# Altium PCB GSH_Bed v1.0.PcbDoc (part 2 of 6)
Units mil, origin at the board's own origin, x right, y up, seen from the top; angles counter-clockwise.
Board outline 4724.41 x 4921.3 mil, 2 copper layers (Top Layer, Bottom Layer); 2 components, 3 nets, 5 pads, 0 vias.
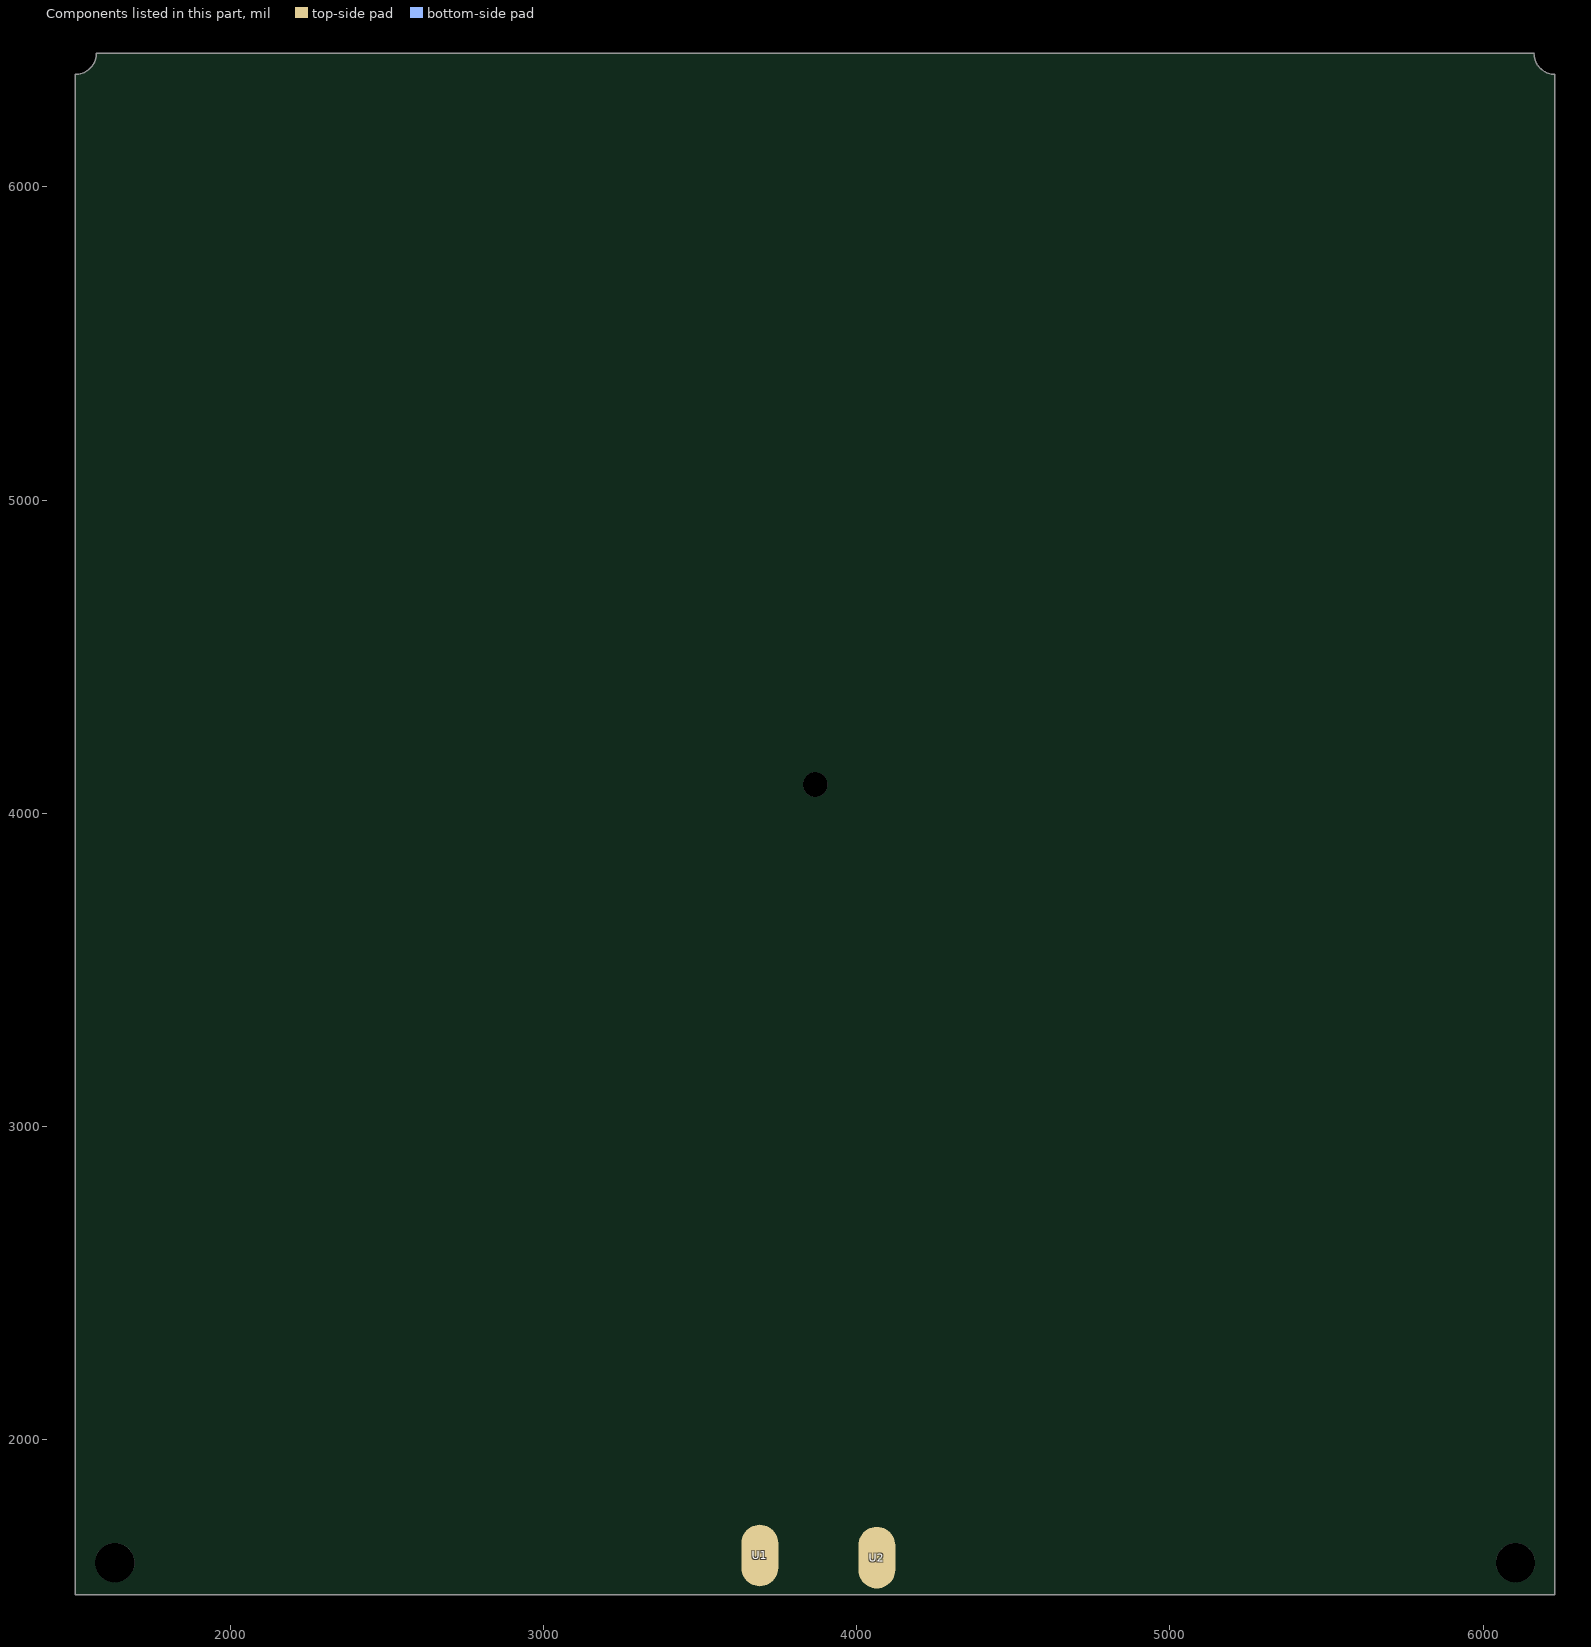
[diagram p2: the components of this part, seen from the top]

## Nets (pads, with @x,y where several pads share a name; then routed paths per layer and width w, separated by ;. In a path a pad name is that pad's centre, name@x,y a point inside that pad or via, vN(x,y) a via of type N, cw(c..) or ccw(c..) an arc to the next point about the centre after c; other vN are vias at no path point) (continued)
copper on no net: (continued)
  Top Layer w25.59: 1617.2,1760.9 1617.2,1792.5 1617.2,1831.8 ; 1617.2,1831.77 1652.64,1831.77 1652.64,1796.34 1723.5,1796.34 1723.5,1831.77 1688.07,1831.77 1688.07,1867.2 1723.5,1867.2 1723.5,1902.64 1652.64,1902.64 1652.64,1867.2 1617.2,1867.2 1617.2,1938.07 1652.64,1938.07 1652.64,1973.51 1617.2,1973.51 1617.2,2044.37 1652.64,2044.37 1652.64,2008.94 1688.07,2008.94 1688.07,2044.37 1723.5,2044.37 1723.5,1973.51 1688.07,1973.51 1688.07,1938.07 1758.94,1938.07 1794.37,1938.07 1794.37,1973.5 1758.93,1973.5 1758.93,2044.36 1794.37,2044.36 1794.37,2008.93 1829.8,2008.93 1829.8,2044.36 1865.23,2044.36 1865.23,1973.5 1829.8,1973.5 1829.8,1938.06 1865.23,1938.06 1865.23,1867.2 1829.8,1867.2 1829.8,1902.63 1758.93,1902.63 1758.93,1867.2 1794.36,1867.2 1794.36,1831.76 1758.93,1831.76 1758.93,1796.33 1829.8,1796.33 1829.8,1831.76 1865.23,1831.76 1865.23,1796.33 1936.09,1796.33 1936.09,1831.76 1900.66,1831.76 1900.66,1902.62 1936.09,1902.62 1936.09,1867.19 1971.53,1867.19 1971.53,1902.62 2006.96,1902.62 2006.96,1831.76 1971.53,1831.76 1971.53,1796.32 2042.39,1796.32 2042.39,1831.76 2077.83,1831.76 2077.83,1796.32 2148.69,1796.32 2148.69,1831.76 2113.26,1831.76 2113.26,1867.19 2148.69,1867.19 2148.69,1902.62 2077.83,1902.62 2077.83,1867.19 2042.4,1867.19 2042.4,1902.62 2042.4,1973.49 2077.84,1973.49 2077.84,1938.06 2148.7,1938.06 2148.7,1973.49 2113.27,1973.49 2113.27,2008.92 2148.7,2008.92 2148.7,2044.36 2077.84,2044.36 2077.84,2008.92 2042.4,2008.92 2042.4,2044.35 1971.54,2044.35 1971.54,2008.92 2006.97,2008.92 2006.97,1938.06 1971.54,1938.06 1971.54,1973.49 1936.1,1973.49 1936.1,1938.06 1900.67,1938.06 1900.67,2008.92 1936.1,2008.92 1936.1,2044.36 1900.67,2044.36 1900.67,2079.79 1936.1,2079.79 1936.1,2115.22 1900.67,2115.22 1900.67,2186.08 1936.1,2186.08 1936.1,2150.65 1971.53,2150.65 1971.53,2186.08 2006.97,2186.08 2006.97,2115.22 1971.53,2115.22 1971.53,2079.78 2042.4,2079.78 2042.4,2115.22 2077.84,2115.22 2077.84,2079.78 2148.7,2079.78 2148.7,2115.22 2113.27,2115.22 2113.27,2150.65 2148.7,2150.65 2148.7,2186.08 2077.84,2186.08 2077.84,2150.65 2042.4,2150.65 2042.4,2186.08 2042.4,2256.95 2077.84,2256.95 2077.84,2221.51 2148.71,2221.51 2148.71,2256.95 2113.28,2256.95 2113.28,2292.38 2148.71,2292.38 2148.71,2327.82 2077.84,2327.82 2077.84,2292.38 2042.41,2292.38 2042.41,2327.81 1971.54,2327.81 1971.54,2292.38 2006.98,2292.38 2006.98,2221.51 1971.54,2221.51 1971.54,2256.95 1936.11,2256.95 1936.11,2221.51 1900.68,2221.51 1900.68,2292.38 1936.11,2292.38 1936.11,2327.82 1900.68,2327.82 1865.24,2327.82 1865.24,2292.38 1829.8,2292.38 1829.8,2327.82 1758.94,2327.82 1758.94,2292.38 1794.37,2292.38 1794.37,2256.95 1758.94,2256.95 1758.94,2221.52 1829.8,2221.52 1829.8,2256.95 1865.24,2256.95 1865.24,2186.08 1829.81,2186.08 1829.81,2150.65 1865.24,2150.65 1865.24,2079.78 1829.81,2079.78 1829.81,2115.22 1794.37,2115.22 1794.37,2079.78 1758.94,2079.78 1758.94,2150.65 1794.37,2150.65 1794.37,2186.09 1723.51,2186.09 1688.08,2186.09 1688.08,2150.65 1723.51,2150.65 1723.51,2079.79 1688.08,2079.79 1688.08,2115.22 1652.64,2115.22 1652.64,2079.79 1617.21,2079.79 1617.21,2150.65 1652.64,2150.65 1652.64,2186.09 1617.21,2186.09 1617.21,2256.96 1652.65,2256.96 1652.65,2221.53 1723.51,2221.53 1723.51,2256.96 1688.08,2256.96 1688.08,2292.39 1723.51,2292.39 1723.51,2327.83 1652.65,2327.83 1652.65,2292.39 1617.21,2292.39 1617.22,2363.26 1652.65,2363.26 1652.65,2398.69 1617.21,2398.69 1617.21,2469.55 1652.65,2469.55 1652.65,2434.12 1688.08,2434.12 1688.08,2469.55 1723.52,2469.55 1723.52,2398.69 1688.08,2398.69 1688.08,2363.25 1758.95,2363.25 1758.95,2398.69 1794.39,2398.69 1794.39,2363.25 1865.25,2363.25 1865.25,2398.69 1829.82,2398.69 1829.82,2434.12 1865.25,2434.12 1865.25,2469.55 1794.39,2469.55 1794.39,2434.12 1758.95,2434.12 1758.95,2469.55 1758.95,2540.42 1794.39,2540.42 1794.39,2504.98 1865.26,2504.98 1865.26,2540.42 1829.83,2540.42 1829.83,2575.85 1865.26,2575.85 1865.26,2611.28 1794.39,2611.28 1794.39,2575.85 1758.96,2575.85 1758.96,2611.28 1688.09,2611.28 1688.09,2575.85 1723.53,2575.85 1723.53,2504.98 1688.09,2504.98 1688.09,2540.41 1652.66,2540.41 1652.66,2504.98 1617.22,2504.98 1617.22,2575.85 1652.66,2575.85 1652.66,2611.29 1617.22,2611.29 1617.22,2646.72 1617.22,2682.15 1652.66,2682.15 1652.66,2646.72 1723.53,2646.72 1723.53,2682.15 1688.1,2682.15 1688.1,2717.59 1723.53,2717.59 1723.53,2753.02 1652.66,2753.02 1652.66,2717.59 1617.23,2717.59 1617.23,2788.45 1652.66,2788.45 1652.66,2823.89 1617.23,2823.89 1617.23,2894.75 1652.66,2894.75 1652.66,2859.32 1688.09,2859.32 1688.09,2894.75 1723.53,2894.75 1723.53,2823.89 1688.09,2823.89 1688.09,2788.45 1758.96,2788.45 1794.39,2788.45 1794.39,2823.88 1758.96,2823.88 1758.96,2894.74 1794.39,2894.74 1794.39,2859.31 1829.83,2859.31 1829.83,2894.74 1865.26,2894.74 1865.26,2823.88 1829.83,2823.88 1829.83,2788.44 1865.26,2788.44 1865.26,2717.57 1829.82,2717.57 1829.82,2753.01 1758.96,2753.01 1758.96,2717.57 1794.39,2717.57 1794.39,2682.14 1758.96,2682.14 1758.96,2646.71 1829.82,2646.71 1829.82,2682.14 1865.25,2682.14 1865.25,2646.71 1900.68,2646.71 1900.68,2682.15 1936.12,2682.15 1936.12,2646.71 2006.99,2646.71 2006.99,2682.15 1971.56,2682.15 1971.56,2717.58 2006.99,2717.58 2006.99,2753.01 1936.12,2753.01 1936.12,2717.58 1900.69,2717.58 1900.69,2788.44 1936.12,2788.44 1936.12,2823.88 1900.69,2823.88 1900.69,2894.74 1936.12,2894.74 1936.12,2859.31 1971.55,2859.31 1971.55,2894.74 2006.99,2894.74 2006.99,2823.88 1971.55,2823.88 1971.55,2788.44 2042.42,2788.44 2077.85,2788.44 2077.85,2823.87 2042.42,2823.87 2042.42,2894.74 2077.85,2894.74 2077.85,2859.31 2113.28,2859.31 2113.28,2894.74 2148.72,2894.74 2148.72,2823.87 2113.28,2823.87 2113.28,2788.43 2148.72,2788.43 2148.72,2717.57 2113.28,2717.57 2113.28,2753 2042.42,2753 2042.42,2717.57 2077.85,2717.57 2077.85,2682.14 2042.42,2682.14 2042.42,2646.7 2113.28,2646.7 2113.28,2682.14 2148.71,2682.14 2148.71,2611.27 2113.28,2611.27 2113.28,2575.84 2148.71,2575.84 2148.71,2504.97 2113.28,2504.97 2113.28,2540.41 2077.85,2540.41 2077.85,2504.97 2042.41,2504.97 2042.41,2575.84 2077.85,2575.84 2077.85,2611.28 2006.98,2611.28 2006.98,2575.84 1971.54,2575.84 1971.54,2611.28 1900.68,2611.28 1900.68,2575.84 1936.11,2575.84 1936.11,2540.41 1900.68,2540.41 1900.68,2504.97 1971.54,2504.97 1971.54,2540.41 2006.98,2540.41 2006.98,2504.98 2006.98,2434.11 1971.54,2434.11 1971.54,2469.55 1900.67,2469.55 1900.67,2434.11 1936.1,2434.11 1936.1,2398.68 1900.67,2398.68 1900.67,2363.24 1971.54,2363.24 1971.54,2398.68 2006.97,2398.68 2006.97,2363.25 2077.84,2363.25 2077.84,2398.68 2042.4,2398.68 2042.4,2469.55 2077.84,2469.55 2077.84,2434.11 2113.27,2434.11 2113.27,2469.55 2148.7,2469.55 2148.7,2398.68 2113.27,2398.68 2113.27,2363.24 2148.7,2363.24 2219.57,2363.24 2219.57,2398.67 2184.13,2398.67 2184.13,2469.53 2219.57,2469.53 2219.57,2434.1 2255,2434.1 2255,2469.53 2290.44,2469.53 2290.44,2398.67 2255,2398.67 2255,2363.23 2325.87,2363.23 2325.87,2398.66 2361.31,2398.66 2361.31,2363.23 2432.17,2363.23 2432.17,2398.66 2396.74,2398.66 2396.74,2434.1 2432.17,2434.1 2432.17,2469.53 2361.31,2469.53 2361.31,2434.1 2325.87,2434.1 2325.87,2469.53 2325.87,2540.4 2361.31,2540.4 2361.31,2504.96 2432.18,2504.96 2432.18,2540.4 2396.75,2540.4 2396.75,2575.83 2432.18,2575.83 2432.18,2611.26 2361.31,2611.26 2361.31,2575.83 2325.88,2575.83 2325.88,2611.26 2255.01,2611.26 2255.01,2575.83 2290.45,2575.83 2290.45,2504.96 2255.01,2504.96 2255.01,2540.4 2219.58,2540.4 2219.58,2504.96 2184.14,2504.96 2184.14,2575.83 2219.58,2575.83 2219.58,2611.26 2184.14,2611.26 2184.14,2646.7 2184.14,2682.13 2219.58,2682.13 2219.58,2646.7 2290.45,2646.7 2290.45,2682.13 2255.02,2682.13 2255.02,2717.56 2290.45,2717.56 2290.45,2753 2219.58,2753 2219.58,2717.56 2184.15,2717.56 2184.15,2788.43 2219.58,2788.43 2219.58,2823.86 2184.15,2823.86 2184.15,2894.73 2219.58,2894.73 2219.58,2859.3 2255.01,2859.3 2255.01,2894.73 2290.45,2894.73 2290.45,2823.86 2255.01,2823.86 2255.01,2788.43 2325.88,2788.43 2361.31,2788.43 2361.31,2823.86 2325.88,2823.86 2325.88,2894.72 2361.31,2894.72 2361.31,2859.29 2396.75,2859.29 2396.75,2894.72 2432.18,2894.72 2432.18,2823.86 2396.75,2823.86 2396.75,2788.42 2432.18,2788.42 2432.18,2717.55 2396.74,2717.55 2396.74,2752.99 2325.88,2752.99 2325.88,2717.55 2361.31,2717.55 2361.31,2682.12 2325.88,2682.12 2325.88,2646.69 2396.74,2646.69 2396.74,2682.12 2432.18,2682.12 2432.17,2646.69 2467.61,2646.69 2467.61,2682.13 2503.05,2682.13 2503.05,2646.69 2573.91,2646.69 2573.91,2682.13 2538.47,2682.13 2538.47,2717.56 2573.91,2717.56 2573.91,2752.99 2503.05,2752.99 2503.05,2717.56 2467.61,2717.56 2467.61,2788.42 2503.04,2788.42 2503.04,2823.86 2467.61,2823.86 2467.61,2894.72 2503.04,2894.72 2503.04,2859.29 2538.47,2859.29 2538.47,2894.72 2573.91,2894.72 2573.91,2823.86 2538.47,2823.86 2538.47,2788.42 2609.34,2788.42 2644.77,2788.42 2644.77,2823.85 2609.34,2823.85 2609.34,2894.72 2644.77,2894.72 2644.77,2859.28 2680.2,2859.28 2680.2,2894.72 2715.64,2894.72 2715.64,2823.85 2680.2,2823.85 2680.2,2788.41 2715.64,2788.41 2715.64,2717.55 2680.2,2717.55 2680.2,2752.98 2609.34,2752.98 2609.34,2717.55 2644.77,2717.55 2644.77,2682.11 2609.34,2682.11 2609.34,2646.68 2680.2,2646.68 2680.2,2682.11 2715.63,2682.11 2715.63,2611.25 2680.2,2611.25 2680.2,2575.82 2715.63,2575.82 2715.63,2504.95 2680.2,2504.95 2680.2,2540.38 2644.77,2540.38 2644.77,2504.95 2609.33,2504.95 2609.33,2575.82 2644.77,2575.82 2644.77,2611.26 2573.91,2611.26 2573.9,2575.82 2538.46,2575.82 2538.46,2611.26 2467.6,2611.26 2467.6,2575.82 2503.03,2575.82 2503.03,2540.39 2467.6,2540.39 2467.6,2504.95 2538.46,2504.95 2538.46,2540.39 2573.89,2540.39 2573.89,2504.96 2573.89,2434.09 2538.45,2434.09 2538.45,2469.53 2467.59,2469.53 2467.59,2434.09 2503.03,2434.09 2503.03,2398.66 2467.59,2398.66 2467.59,2363.22 2538.45,2363.22 2538.45,2398.66 2573.89,2398.66 2573.89,2363.23 2644.76,2363.23 2644.76,2398.66 2609.32,2398.66 2609.32,2469.53 2644.76,2469.53 2644.76,2434.09 2680.19,2434.09 2680.19,2469.53 2715.62,2469.53 2715.62,2398.66 2680.19,2398.66 2680.19,2363.22 2715.62,2363.22 2715.62,2327.79 2715.62,2292.36 2680.18,2292.36 2680.18,2327.79 2609.32,2327.79 2609.32,2292.36 2644.75,2292.36 2644.75,2256.93 2609.32,2256.93 2609.32,2221.49 2680.18,2221.49 2680.18,2256.93 2715.62,2256.93 2715.62,2186.06 2680.19,2186.06 2680.19,2150.62 2715.62,2150.62 2715.62,2079.76 2680.19,2079.76 2680.19,2115.19 2644.75,2115.19 2644.75,2079.76 2609.32,2079.76 2609.32,2150.62 2644.75,2150.62 2644.75,2186.06 2573.89,2186.06 2538.45,2186.06 2538.45,2150.63 2573.89,2150.63 2573.89,2079.77 2538.45,2079.77 2538.45,2115.2 2503.02,2115.2 2503.02,2079.77 2467.59,2079.77 2467.59,2150.63 2503.02,2150.63 2503.02,2186.07 2467.59,2186.07 2467.59,2256.93 2503.03,2256.93 2503.03,2221.5 2573.89,2221.5 2573.89,2256.93 2538.46,2256.93 2538.46,2292.36 2573.89,2292.36 2573.89,2327.8 2503.03,2327.8 2503.03,2292.36 2467.59,2292.36 2467.6,2327.8 2396.73,2327.8 2396.73,2292.36 2432.16,2292.36 2432.16,2221.51 2396.73,2221.51 2396.73,2256.93 2361.3,2256.93 2361.3,2221.51 2325.86,2221.51 2325.86,2292.36 2361.3,2292.36 2361.3,2327.8 2290.43,2327.8 2290.43,2292.37 2254.99,2292.37 2254.99,2327.8 2184.13,2327.8 2184.13,2292.37 2219.56,2292.37 2219.56,2256.94 2184.13,2256.94 2184.13,2221.51 2254.99,2221.51 2254.99,2256.94 2290.43,2256.94 2290.43,2221.51 2290.43,2150.64 2254.99,2150.64 2254.99,2186.08 2184.12,2186.08 2184.12,2150.64 2219.55,2150.64 2219.55,2115.21 2184.12,2115.21 2184.12,2079.77 2254.99,2079.77 2254.99,2115.21 2290.42,2115.21 2290.42,2079.78 2361.29,2079.78 2361.29,2115.21 2325.85,2115.21 2325.85,2186.08 2361.29,2186.08 2361.29,2150.64 2396.72,2150.64 2396.72,2186.08 2432.15,2186.08 2432.15,2115.21 2396.72,2115.21 2396.72,2079.77 2432.15,2079.77 2432.15,2044.34 2396.72,2044.34 2396.72,2008.91 2432.15,2008.91 2432.15,1938.04 2396.72,1938.04 2396.72,1973.47 2361.29,1973.47 2361.29,1938.04 2325.86,1938.04 2325.86,2008.91 2361.29,2008.91 2361.29,2044.35 2290.43,2044.35 2290.42,2008.91 2254.98,2008.91 2254.98,2044.35 2184.12,2044.35 2184.12,2008.91 2219.55,2008.91 2219.55,1973.48 2184.12,1973.48 2184.12,1938.04 2254.98,1938.04 2254.98,1973.48 2290.42,1973.48 2290.42,1938.05 2290.42,1867.18 2254.98,1867.18 2254.98,1902.61 2184.11,1902.61 2184.11,1867.18 2219.55,1867.18 2219.55,1831.75 2184.11,1831.75 2184.11,1796.32 2254.98,1796.32 2254.98,1831.75 2290.41,1831.75 2290.41,1796.32 2361.28,1796.32 2361.28,1831.75 2325.84,1831.75 2325.84,1902.61 2361.28,1902.61 2361.28,1867.18 2396.71,1867.18 2396.71,1902.61 2432.15,1902.61 2432.15,1831.75 2396.71,1831.75 2396.71,1796.31 2432.15,1796.31 2467.58,1796.31 2467.58,1831.74 2503.02,1831.74 2503.02,1796.31 2573.88,1796.31 2573.88,1831.74 2538.45,1831.74 2538.45,1867.18 2573.88,1867.18 2573.88,1902.61 2503.02,1902.61 2503.02,1867.18 2467.59,1867.18 2467.59,1938.04 2503.02,1938.04 2503.02,1973.48 2467.58,1973.48 2467.58,2044.34 2503.02,2044.34 2503.02,2008.91 2538.45,2008.91 2538.45,2044.34 2573.88,2044.34 2573.88,1973.48 2538.45,1973.48 2538.45,1938.04 2609.32,1938.04 2644.75,1938.04 2644.75,1973.47 2609.31,1973.47 2609.31,2044.34 2644.75,2044.34 2644.75,2008.91 2680.18,2008.91 2680.18,2044.34 2715.61,2044.34 2715.61,1973.47 2680.18,1973.47 2680.18,1938.03 2715.61,1938.03 2715.61,1867.17 2680.17,1867.17 2680.17,1902.6 2609.31,1902.6 2609.31,1867.17 2644.74,1867.17 2644.74,1831.73 2609.31,1831.73 2609.31,1796.3 2680.17,1796.3 2680.17,1831.73 2715.61,1831.73 2715.61,1796.3 2786.47,1796.29 2786.47,1831.73 2751.03,1831.73 2751.03,1902.59 2786.47,1902.59 2786.47,1867.16 2821.9,1867.16 2821.9,1902.59 2857.34,1902.59 2857.34,1831.73 2821.9,1831.73 2821.9,1796.29 2892.77,1796.29 2892.77,1831.72 2928.21,1831.72 2928.21,1796.29 2999.07,1796.29 2999.07,1831.72 2963.64,1831.72 2963.64,1867.16 2999.07,1867.16 2999.07,1902.59 2928.21,1902.59 2928.21,1867.16 2892.77,1867.16 2892.77,1902.59 2892.77,1973.46 2928.21,1973.46 2928.21,1938.02 2999.07,1938.02 2999.07,1973.46 2963.65,1973.46 2963.65,2008.89 2999.07,2008.89 2999.07,2044.32 2928.21,2044.32 2928.21,2008.89 2892.78,2008.89 2892.78,2044.32 2821.91,2044.32 2821.91,2008.89 2857.35,2008.89 2857.35,1938.02 2821.91,1938.02 2821.91,1973.46 2786.48,1973.46 2786.48,1938.02 2751.05,1938.02 2751.05,2008.89 2786.48,2008.89 2786.48,2044.33 2751.05,2044.33 2751.05,2079.76 2751.05,2115.19 2786.48,2115.19 2786.48,2079.76 2857.35,2079.76 2857.35,2115.19 2821.92,2115.19 2821.92,2150.62 2857.35,2150.62 2857.35,2186.06 2786.48,2186.06 2786.48,2150.62 2751.05,2150.62 2751.05,2221.49 2786.48,2221.49 2786.48,2256.93 2751.05,2256.93 2751.05,2327.79 2786.48,2327.79 2786.48,2292.36 2821.91,2292.36 2821.91,2327.79 2857.35,2327.79 2857.35,2256.93 2821.91,2256.93 2821.91,2221.48 2892.78,2221.48 2928.21,2221.48 2928.21,2256.92 2892.78,2256.92 2892.78,2327.78 2928.21,2327.78 2928.21,2292.35 2963.65,2292.35 2963.65,2327.78 2999.08,2327.78 2999.08,2256.92 2963.65,2256.92 2963.65,2221.48 2999.08,2221.48 2999.08,2150.61 2963.64,2150.61 2963.64,2186.05 2892.78,2186.05 2892.78,2150.61 2928.21,2150.61 2928.21,2115.18 2892.78,2115.18 2892.78,2079.75 2963.64,2079.75 2963.64,2115.18 2999.07,2115.18 2999.07,2079.75 3034.51,2079.75 3034.51,2115.18 3069.94,2115.18 3069.94,2079.75 3140.81,2079.75 3140.81,2115.18 3105.38,2115.18 3105.38,2150.61 3140.81,2150.61 3140.81,2186.05 3069.94,2186.05 3069.94,2150.61 3034.51,2150.61 3034.51,2221.48 3069.94,2221.48 3069.94,2256.92 3034.51,2256.92 3034.51,2327.78 3069.94,2327.78 3069.94,2292.35 3105.38,2292.35 3105.38,2327.78 3140.81,2327.78 3140.81,2256.92 3105.38,2256.92 3105.38,2221.48 3176.24,2221.48 3211.68,2221.48 3211.68,2256.91 3176.24,2256.91 3176.24,2327.78 3211.68,2327.78 3211.68,2292.35 3247.11,2292.35 3247.11,2327.78 3282.54,2327.78 3282.54,2256.91 3247.11,2256.91 3247.11,2221.47 3282.54,2221.47 3282.54,2150.61 3247.1,2150.61 3247.1,2186.04 3176.24,2186.04 3176.24,2150.61 3211.67,2150.61 3211.67,2115.18 3176.24,2115.18 3176.24,2079.74 3247.1,2079.74 3247.1,2115.18 3282.53,2115.18 3282.53,2044.31 3247.1,2044.31 3247.1,2008.88 3282.53,2008.88 3282.53,1938.01 3247.1,1938.01 3247.1,1973.44 3211.67,1973.44 3211.67,1938.01 3176.23,1938.01 3176.23,2008.88 3211.67,2008.88 3211.67,2044.32 3140.81,2044.32 3140.8,2008.88 3105.36,2008.88 3105.36,2044.32 3034.5,2044.32 3034.5,2008.88 3069.93,2008.88 3069.93,1973.45 3034.5,1973.45 3034.5,1938.01 3105.36,1938.01 3105.36,1973.45 3140.8,1973.45 3140.8,1938.02 3140.8,1867.15 3105.36,1867.15 3105.36,1902.58 3034.49,1902.58 3034.49,1867.15 3069.93,1867.15 3069.93,1831.72 3034.49,1831.72 3034.49,1796.28 3105.36,1796.28 3105.36,1831.72 3140.79,1831.72 3140.79,1796.28 3211.66,1796.28 3211.66,1831.72 3176.23,1831.72 3176.23,1902.58 3211.66,1902.58 3211.66,1867.15 3247.09,1867.15 3247.09,1902.58 3282.53,1902.58 3282.53,1831.72 3247.09,1831.72 3247.09,1796.28 3282.53,1796.28 3317.95,1796.28 3317.95,1831.71 3353.39,1831.71 3353.39,1796.28 3424.26,1796.28 3424.26,1831.71 3388.83,1831.71 3388.83,1867.14 3424.26,1867.14 3424.26,1902.58 3353.39,1902.58 3353.39,1867.14 3317.96,1867.14 3317.96,1938.01 3353.39,1938.01 3353.39,1973.45 3317.96,1973.45 3317.96,2044.31 3353.39,2044.31 3353.39,2008.88 3388.82,2008.88 3388.82,2044.31 3424.26,2044.31 3424.26,1973.45 3388.82,1973.45 3388.82,1938.01 3459.69,1938.01 3495.12,1938.01 3495.12,1973.44 3459.69,1973.44 3459.69,2044.3 3495.12,2044.3 3495.12,2008.87 3530.55,2008.87 3530.55,2044.3 3565.99,2044.3 3565.99,1973.44 3530.55,1973.44 3530.55,1938 3565.99,1938 3565.99,1867.13 3530.55,1867.13 3530.55,1902.57 3459.69,1902.57 3459.69,1867.13 3495.12,1867.13 3495.12,1831.7 3459.69,1831.7 3459.69,1796.27 3530.55,1796.27 3530.55,1831.7 3565.98,1831.7 3565.98,1796.27 3636.85,1796.27 3636.85,1831.7 3601.41,1831.7 3601.41,1902.56 3636.85,1902.56 3636.85,1867.13 3672.28,1867.13 3672.28,1902.56 3707.72,1902.56 3707.72,1831.7 3672.28,1831.7 3672.28,1796.26 3743.14,1796.26 3743.15,1831.7 3778.59,1831.7 3778.59,1796.26 3849.45,1796.26 3849.45,1831.7 3814.02,1831.7 3814.02,1867.13 3849.45,1867.13 3849.45,1902.56 3778.59,1902.56 3778.59,1867.13 3743.15,1867.13 3743.15,1902.56 3743.15,1973.43 3778.59,1973.43 3778.59,1937.99 3849.46,1937.99 3849.46,1973.43 3814.02,1973.43 3814.02,2008.86 3849.46,2008.86 3849.46,2044.3 3778.59,2044.3 3778.59,2008.86 3743.16,2008.86 3743.16,2044.29 3672.29,2044.29 3672.29,2008.86 3707.72,2008.86 3707.72,1937.99 3672.29,1937.99 3672.29,1973.43 3636.86,1973.43 3636.86,1937.99 3601.42,1937.99 3601.42,2008.86 3636.86,2008.86 3636.86,2044.3 3601.42,2044.3 3601.42,2079.73 3636.86,2079.73 3636.86,2115.16 3601.42,2115.16 3601.42,2186.03 3636.86,2186.03 3636.86,2150.59 3672.29,2150.59 3672.29,2186.03 3707.72,2186.03 3707.72,2115.16 3672.29,2115.16 3672.29,2079.72 3743.15,2079.72 3743.15,2115.16 3778.59,2115.16 3778.59,2079.72 3849.46,2079.72 3849.46,2115.16 3814.03,2115.16 3814.03,2150.59 3849.46,2150.59 3849.46,2186.03 3778.59,2186.03 3778.59,2150.59 3743.16,2150.59 3743.16,2186.02 3743.16,2256.89 3778.6,2256.89 3778.6,2221.45 3849.46,2221.45 3849.46,2256.89 3814.03,2256.89 3814.03,2292.32 3849.46,2292.32 3849.46,2327.76 3778.6,2327.76 3778.6,2292.32 3743.16,2292.32 3743.16,2327.76 3672.3,2327.76 3672.3,2292.32 3707.73,2292.32 3707.73,2221.45 3672.3,2221.45 3672.3,2256.89 3636.86,2256.89 3636.86,2221.45 3601.43,2221.45 3601.43,2292.32 3636.86,2292.32 3636.86,2327.76 3601.43,2327.76 3566,2327.76 3566,2292.33 3530.56,2292.33 3530.56,2327.76 3459.7,2327.76 3459.7,2292.33 3495.13,2292.33 3495.13,2256.89 3459.7,2256.89 3459.7,2221.45 3530.56,2221.45 3530.56,2256.89 3565.99,2256.89 3565.99,2186.03 3530.56,2186.03 3530.56,2150.59 3566,2150.59 3566,2079.73 3530.56,2079.73 3530.56,2115.16 3495.13,2115.16 3495.13,2079.73 3459.7,2079.73 3459.7,2150.59 3495.13,2150.59 3495.13,2186.03 3424.26,2186.03 3388.83,2186.03 3388.83,2150.59 3424.26,2150.59 3424.26,2079.73 3388.83,2079.73 3388.83,2115.16 3353.4,2115.16 3353.4,2079.73 3317.96,2079.73 3317.96,2150.59 3353.4,2150.59 3353.4,2186.03 3317.96,2186.03 3317.96,2256.9 3353.4,2256.9 3353.4,2221.47 3424.26,2221.47 3424.26,2256.9 3388.84,2256.9 3388.84,2292.34 3424.26,2292.34 3424.26,2327.77 3353.4,2327.77 3353.4,2292.34 3317.97,2292.34 3317.98,2363.2 3317.98,2398.64 3353.42,2398.64 3353.42,2363.2 3424.28,2363.2 3424.28,2398.64 3388.85,2398.64 3388.85,2434.07 3424.28,2434.07 3424.28,2469.5 3353.42,2469.5 3353.42,2434.07 3317.98,2434.07 3317.98,2504.93 3353.41,2504.93 3353.41,2540.37 3317.98,2540.37 3317.98,2611.23 3353.41,2611.23 3353.41,2575.8 3388.84,2575.8 3388.84,2611.23 3424.28,2611.23 3424.28,2540.37 3388.84,2540.37 3388.84,2504.93 3459.71,2504.93 3495.14,2504.93 3495.14,2540.36 3459.71,2540.36 3459.71,2611.22 3495.14,2611.22 3495.14,2575.8 3530.58,2575.8 3530.58,2611.22 3566.01,2611.22 3566.01,2540.36 3530.58,2540.36 3530.58,2504.92 3566.01,2504.92 3566.01,2434.06 3530.57,2434.06 3530.57,2469.49 3459.71,2469.49 3459.71,2434.06 3495.14,2434.06 3495.14,2398.62 3459.71,2398.62 3459.71,2363.19 3530.57,2363.19 3530.57,2398.62 3566.01,2398.62 3566,2363.19 3636.87,2363.19 3636.87,2398.62 3601.44,2398.62 3601.44,2469.49 3636.87,2469.49 3636.87,2434.06 3672.3,2434.06 3672.3,2469.49 3707.74,2469.49 3707.74,2398.62 3672.3,2398.62 3672.3,2363.19 3743.17,2363.19 3743.17,2398.62 3778.61,2398.62 3778.61,2363.19 3849.47,2363.19 3849.47,2398.62 3814.04,2398.62 3814.04,2434.05 3849.47,2434.05 3849.47,2469.49 3778.61,2469.49 3778.61,2434.05 3743.17,2434.05 3743.17,2469.49 3743.17,2540.35 3778.61,2540.35 3778.61,2504.92 3849.48,2504.92 3849.48,2540.35 3814.05,2540.35 3814.05,2575.78 3849.48,2575.78 3849.48,2611.22 3778.61,2611.22 3778.61,2575.78 3743.18,2575.78 3743.18,2611.22 3672.31,2611.22 3672.31,2575.78 3707.75,2575.78 3707.75,2504.92 3672.31,2504.92 3672.31,2540.35 3636.88,2540.35 3636.88,2504.92 3601.45,2504.92 3601.45,2575.78 3636.88,2575.78 3636.88,2611.22 3601.45,2611.22 3601.45,2646.65 3636.88,2646.65 3636.88,2682.09 3601.44,2682.09 3601.44,2752.95 3636.88,2752.95 3636.88,2717.52 3672.31,2717.52 3672.31,2752.95 3707.74,2752.95 3707.74,2682.09 3672.31,2682.09 3672.31,2646.64 3743.17,2646.64 ; 1617.29,4737.22 1652.72,4737.22 1652.72,4701.78 1617.29,4701.78 1617.29,4630.92 1652.72,4630.92 1652.72,4666.35 1688.16,4666.35 1688.16,4630.92 1723.59,4630.92 1723.59,4701.78 1688.16,4701.78 1688.16,4737.22 1723.59,4737.22 1794.46,4737.22 1794.46,4701.78 1759.02,4701.78 1759.02,4630.92 1794.46,4630.92 1794.46,4666.35 1829.89,4666.35 1829.89,4630.92 1865.32,4630.92 1865.32,4701.78 1829.89,4701.78 1829.89,4737.22 1865.32,4737.22 1865.32,4808.08 1829.89,4808.08 1829.89,4772.65 1759.02,4772.65 1759.02,4808.08 1794.45,4808.08 1794.45,4843.51 1759.02,4843.51 1759.02,4878.95 1829.89,4878.95 1829.89,4843.51 1865.33,4843.51 1865.33,4878.95 1900.76,4878.95 1900.76,4843.52 1936.19,4843.52 1936.19,4878.95 2007.05,4878.95 2007.05,4843.52 1971.62,4843.52 1971.62,4808.08 2007.05,4808.08 2007.05,4772.65 1936.19,4772.65 1936.19,4808.08 1900.75,4808.08 1900.75,4737.22 1936.18,4737.22 1936.18,4701.78 1900.75,4701.78 1900.75,4630.92 1936.18,4630.92 1936.18,4666.35 1971.62,4666.35 1971.62,4630.92 2007.05,4630.92 2007.05,4701.78 1971.62,4701.78 1971.62,4737.21 2007.05,4737.21 2077.92,4737.21 2077.92,4701.77 2042.48,4701.77 2042.48,4630.91 2077.92,4630.91 2077.92,4666.34 2113.35,4666.34 2113.35,4630.91 2148.78,4630.91 2148.78,4701.77 2113.35,4701.77 2113.35,4737.2 2148.78,4737.2 2148.78,4808.07 2113.35,4808.07 2113.35,4772.64 2042.48,4772.64 2042.48,4808.07 2077.91,4808.07 2077.91,4843.5 2042.48,4843.5 2042.48,4878.94 2113.35,4878.94 2113.35,4843.5 2148.78,4843.5 2148.78,4878.94 2148.78,4914.37 2113.35,4914.37 2113.35,4949.81 2148.78,4949.81 2148.78,5020.68 2113.35,5020.68 2113.35,4985.24 2077.92,4985.24 2077.92,5020.68 2042.48,5020.68 2042.48,4949.81 2077.92,4949.81 2077.92,4914.38 2007.05,4914.38 2007.05,4949.81 1971.62,4949.81 1971.62,4914.37 1900.75,4914.37 1900.75,4949.81 1936.18,4949.81 1936.18,4985.24 1900.75,4985.24 1900.75,5020.68 1971.62,5020.68 1971.62,4985.24 2007.06,4985.24 2007.06,5056.11 2007.06,5091.54 1971.62,5091.54 1971.62,5056.11 1900.76,5056.11 1900.76,5091.54 1936.19,5091.54 1936.19,5126.98 1900.76,5126.98 1900.76,5162.41 1971.62,5162.41 1971.62,5126.98 2007.06,5126.98 2007.06,5162.41 2077.93,5162.41 2077.93,5126.97 2042.49,5126.97 2042.49,5056.11 2077.93,5056.11 2077.93,5091.54 2113.36,5091.54 2113.36,5056.11 2148.8,5056.11 2148.8,5126.97 2113.36,5126.97 2113.36,5162.4 2184.22,5162.4 ; 1617.29,4737.23 1617.29,4808.09 1652.73,4808.09 1652.73,4772.66 1723.59,4772.66 1723.59,4808.09 1688.16,4808.09 1688.16,4843.52 1723.59,4843.52 1723.59,4878.96 1652.73,4878.96 1652.73,4843.52 1617.3,4843.52 1617.3,4914.39 1652.73,4914.39 1652.73,4949.82 1617.3,4949.82 1617.3,5020.69 1652.73,5020.69 1652.73,4985.25 1688.16,4985.25 1688.16,5020.69 1723.6,5020.69 1723.6,4949.82 1688.16,4949.82 1688.16,4914.38 1759.03,4914.38 1759.03,4949.82 1794.47,4949.82 1794.47,4914.38 1865.33,4914.38 1865.33,4949.82 1829.9,4949.82 1829.9,4985.25 1865.33,4985.25 1865.33,5020.69 1794.47,5020.69 1794.47,4985.25 1759.03,4985.25 1759.03,5020.68 1759.03,5091.55 1794.47,5091.55 1794.47,5056.12 1865.34,5056.12 1865.34,5091.55 1829.91,5091.55 1829.91,5126.98 1865.34,5126.98 1865.34,5162.41 1794.47,5162.41 1794.47,5126.98 1759.04,5126.98 1759.04,5162.41 1688.17,5162.41 1688.17,5126.98 1723.61,5126.98 1723.61,5056.12 1688.17,5056.12 1688.17,5091.55 1652.74,5091.55 1652.74,5056.12 1617.31,5056.12 1617.31,5126.98 1652.74,5126.98 1652.74,5162.41 1617.31,5162.41 1617.31,5197.85 1617.31,5233.28 1652.74,5233.28 1652.74,5197.85 1723.61,5197.85 1723.61,5233.28 1688.18,5233.28 1688.18,5268.71 1723.61,5268.71 1723.61,5304.15 1652.74,5304.15 1652.74,5268.71 1617.31,5268.71 1617.31,5339.58 1652.74,5339.58 1652.74,5375.02 1617.31,5375.02 1617.31,5445.88 1652.74,5445.88 1652.74,5410.45 1688.17,5410.45 1688.17,5445.88 1723.61,5445.88 1723.61,5375.02 1688.17,5375.02 1688.17,5339.58 1759.04,5339.58 1794.47,5339.58 1794.47,5375.01 1759.04,5375.01 1759.04,5445.87 1794.47,5445.87 1794.47,5410.44 1829.91,5410.44 1829.91,5445.87 1865.34,5445.87 1865.34,5375.01 1829.91,5375.01 1829.91,5339.57 1865.34,5339.57 1865.34,5268.7 1829.9,5268.7 1829.9,5304.14 1759.04,5304.14 1759.04,5268.7 1794.47,5268.7 1794.47,5233.27 1759.04,5233.27 1759.04,5197.84 1829.9,5197.84 1829.9,5233.27 1865.34,5233.27 1865.33,5197.84 1936.2,5197.84 1936.2,5233.27 1900.77,5233.27 1900.77,5304.13 1936.2,5304.13 1936.2,5268.7 1971.63,5268.7 1971.63,5304.13 2007.07,5304.13 2007.07,5233.27 1971.63,5233.27 1971.63,5197.84 2042.5,5197.84 2042.5,5233.27 2077.94,5233.27 2077.94,5197.84 2148.8,5197.84 2148.8,5233.27 2113.37,5233.27 2113.37,5268.7 2148.8,5268.7 2148.8,5304.13 2077.94,5304.13 2077.94,5268.7 2042.5,5268.7 2042.5,5304.13 2042.5,5375 2077.94,5375 2077.94,5339.56 2148.81,5339.56 2148.81,5375 2113.38,5375 2113.38,5410.43 2148.81,5410.43 2148.81,5445.87 2077.94,5445.87 2077.94,5410.43 2042.51,5410.43 2042.51,5445.86 1971.64,5445.86 1971.64,5410.43 2007.08,5410.43 2007.08,5339.56 1971.64,5339.56 1971.64,5375 1936.21,5375 1936.21,5339.56 1900.78,5339.56 1900.78,5410.43 1936.21,5410.43 1936.21,5445.87 1900.78,5445.87 1900.78,5481.3 1936.21,5481.3 1936.21,5516.73 1900.77,5516.73 1900.77,5587.6 1936.21,5587.6 1936.21,5552.17 1971.64,5552.17 1971.64,5587.6 2007.07,5587.6 2007.07,5516.73 1971.64,5516.73 1971.64,5481.29 2042.5,5481.29 2042.51,5516.73 2077.95,5516.73 2077.95,5481.29 2148.81,5481.29 2148.81,5516.73 2113.38,5516.73 2113.38,5552.16 2148.81,5552.16 2148.81,5587.6 2077.95,5587.6 2077.95,5552.16 2042.51,5552.16 2042.51,5587.59 2042.51,5658.46 2077.95,5658.46 2077.95,5623.02 2148.81,5623.02 2148.81,5658.46 2113.38,5658.46 2113.38,5693.89 2148.81,5693.89 2148.81,5729.32 2077.95,5729.32 2077.95,5693.89 2042.52,5693.89 2042.52,5729.32 1971.65,5729.32 1971.65,5693.89 2007.08,5693.89 2007.08,5623.02 1971.65,5623.02 1971.65,5658.45 1936.22,5658.45 1936.22,5623.02 1900.78,5623.02 1900.78,5693.89 1936.22,5693.89 1936.22,5729.33 1900.78,5729.33 1865.35,5729.33 1865.35,5693.89 1829.91,5693.89 1829.91,5729.33 1759.05,5729.33 1759.05,5693.89 1794.48,5693.89 1794.48,5658.46 1759.05,5658.46 1759.05,5623.02 1829.91,5623.02 1829.91,5658.46 1865.34,5658.46 1865.34,5587.6 1829.91,5587.6 1829.91,5552.16 1865.35,5552.16 1865.35,5481.3 1829.91,5481.3 1829.91,5516.73 1794.48,5516.73 1794.48,5481.3 1759.05,5481.3 1759.05,5552.16 1794.48,5552.16 1794.48,5587.6 1723.61,5587.6 1688.18,5587.6 1688.18,5552.17 1723.62,5552.17 1723.62,5481.3 1688.18,5481.3 1688.18,5516.73 1652.75,5516.73 1652.75,5481.3 1617.32,5481.3 1617.32,5552.17 1652.75,5552.17 1652.75,5587.6 1617.32,5587.6 1617.32,5658.47 1652.76,5658.47 1652.76,5623.03 1723.62,5623.03 1723.62,5658.47 1688.19,5658.47 1688.19,5693.9 1723.62,5693.9 1723.62,5729.34 1652.76,5729.34 1652.76,5693.9 1617.32,5693.9 1617.32,5764.77 1652.76,5764.77 1652.76,5800.2 1617.32,5800.2 1617.32,5871.06 1652.76,5871.06 1652.76,5835.63 1688.19,5835.63 1688.19,5871.06 1723.62,5871.06 1723.62,5800.2 1688.19,5800.2 1688.19,5764.76 1759.05,5764.76 1759.05,5800.2 1794.49,5800.2 1794.49,5764.76 1865.36,5764.76 1865.36,5800.2 1829.92,5800.2 1829.92,5835.63 1865.36,5835.63 1865.36,5871.06 1794.49,5871.06 1794.49,5835.63 1759.06,5835.63 1759.06,5871.06 1759.06,5941.93 1794.5,5941.93 1794.5,5906.49 1865.36,5906.49 1865.36,5941.93 1829.93,5941.93 1829.93,5977.36 1865.36,5977.36 1865.36,6012.8 1794.5,6012.8 1794.5,5977.36 1759.06,5977.36 1759.06,6012.79 1688.2,6012.79 1688.2,5977.36 1723.63,5977.36 1723.63,5906.49 1688.2,5906.49 1688.2,5941.93 1652.77,5941.93 1652.77,5906.49 1617.33,5906.49 1617.33,5977.36 1652.77,5977.36 1652.77,6012.8 1617.33,6012.8 1617.33,6048.23 ; 1617.33,6048.23 1617.33,6083.66 1652.77,6083.66 1652.77,6048.23 1723.63,6048.23 1723.63,6083.66 1688.2,6083.66 1688.2,6119.1 1723.63,6119.1 1723.63,6154.53 1652.77,6154.53 1652.77,6119.1 1617.34,6119.1 1617.34,6189.96 1652.77,6189.96 1652.77,6225.4 1617.33,6225.4 1617.33,6296.26 1652.77,6296.26 1652.77,6260.83 1688.2,6260.83 1688.2,6296.26 1723.63,6296.26 1723.63,6225.4 1688.2,6225.4 1688.2,6189.96 1759.07,6189.96 1794.5,6189.96 1794.5,6225.39 1759.06,6225.39 1759.06,6296.25 1794.5,6296.25 1794.5,6260.82 1829.93,6260.82 1829.93,6296.25 1865.37,6296.25 1865.37,6225.39 1829.93,6225.39 1829.93,6189.95 1865.37,6189.95 1865.37,6119.09 1829.92,6119.09 1829.92,6154.52 1759.06,6154.52 1759.06,6119.09 1794.49,6119.09 1794.49,6083.65 1759.06,6083.65 1759.06,6048.22 1829.92,6048.22 1829.92,6083.65 1865.36,6083.65 1865.36,6048.22 1900.79,6048.22 1900.79,6083.65 1936.23,6083.65 1936.23,6048.22 2007.09,6048.22 2007.09,6083.65 1971.66,6083.65 1971.66,6119.09 2007.09,6119.09 2007.09,6154.52 1936.23,6154.52 1936.23,6119.09 1900.79,6119.09 1900.79,6189.95 1936.23,6189.95 1936.23,6225.39 1900.79,6225.39 1900.79,6296.25 1936.23,6296.25 1936.23,6260.82 1971.66,6260.82 1971.66,6296.25 2007.09,6296.25 2007.09,6225.39 1971.66,6225.39 1971.66,6189.95 2042.53,6189.95 2077.96,6189.95 2077.96,6225.38 2042.52,6225.38 2042.52,6296.25 2077.96,6296.25 2077.96,6260.82 2113.39,6260.82 2113.39,6296.25 2148.82,6296.25 2148.82,6225.38 2113.39,6225.38 2113.39,6189.94 2148.82,6189.94 2148.82,6119.08 2113.39,6119.08 2113.39,6154.51 2042.52,6154.51 2042.52,6119.08 2077.95,6119.08 2077.95,6083.65 2042.52,6083.65 2042.52,6048.21 2113.39,6048.21 2113.39,6083.65 2148.82,6083.65 2148.82,6012.78 2113.39,6012.78 2113.39,5977.35 2148.82,5977.35 2148.82,5906.49 2113.39,5906.49 2113.39,5941.92 2077.95,5941.92 2077.95,5906.49 2042.52,5906.49 2042.52,5977.35 2077.95,5977.35 2077.95,6012.79 2007.09,6012.79 2007.09,5977.35 1971.65,5977.35 1971.65,6012.79 1900.79,6012.79 1900.79,5977.35 1936.21,5977.35 1936.21,5941.92 1900.79,5941.92 1900.79,5906.49 1971.65,5906.49 1971.65,5941.92 2007.08,5941.92 2007.08,5906.49 2007.08,5835.62 1971.64,5835.62 1971.64,5871.06 1900.78,5871.06 1900.78,5835.62 1936.21,5835.62 1936.21,5800.19 1900.78,5800.19 1900.78,5764.75 1971.64,5764.75 1971.64,5800.19 2007.08,5800.19 2007.08,5764.76 2077.94,5764.76 2077.94,5800.19 2042.51,5800.19 2042.51,5871.06 2077.94,5871.06 2077.94,5835.62 2113.38,5835.62 2113.38,5871.06 2148.81,5871.06 2148.81,5800.19 2113.38,5800.19 2113.38,5764.75 2148.81,5764.75 2219.67,5764.74 2219.67,5800.18 2184.24,5800.18 2184.24,5871.04 2219.67,5871.04 2219.67,5835.61 2255.11,5835.61 2255.11,5871.04 2290.55,5871.04 2290.55,5800.18 2255.11,5800.18 2255.11,5764.74 2325.97,5764.74 2325.97,5800.17 2361.41,5800.17 2361.41,5764.74 2432.28,5764.74 2432.28,5800.17 2396.85,5800.17 2396.85,5835.61 2432.28,5835.61 2432.28,5871.04 2361.41,5871.04 2361.41,5835.61 2325.98,5835.61 2325.98,5871.04 2325.98,5941.91 2361.42,5941.91 2361.42,5906.47 2432.28,5906.47 2432.28,5941.91 2396.85,5941.91 2396.85,5977.34 2432.28,5977.34 2432.28,6012.77 2361.42,6012.77 2361.42,5977.34 2325.99,5977.34 2325.99,6012.77 2255.12,6012.77 2255.12,5977.34 2290.55,5977.34 2290.55,5906.47 2255.12,5906.47 2255.12,5941.91 2219.68,5941.91 2219.68,5906.47 2184.25,5906.47 2184.25,5977.34 2219.68,5977.34 2219.68,6012.78 2184.25,6012.78 2184.25,6048.21 2184.25,6083.64 2219.69,6083.64 2219.69,6048.21 2290.55,6048.21 2290.55,6083.64 2255.12,6083.64 2255.12,6119.07 2290.55,6119.07 2290.55,6154.51 2219.69,6154.51 2219.69,6119.07 2184.25,6119.07 2184.25,6189.94 2219.69,6189.94 2219.69,6225.37 2184.25,6225.37 2184.25,6296.24 2219.69,6296.24 2219.69,6260.81 2255.12,6260.81 2255.12,6296.24 2290.55,6296.24 2290.55,6225.37 2255.12,6225.37 2255.12,6189.93 2325.99,6189.93 2361.42,6189.93 2361.42,6225.37 2325.99,6225.37 2325.99,6296.23 2361.42,6296.23 2361.42,6260.8 2396.85,6260.8 2396.85,6296.23 2432.29,6296.23 2432.29,6225.37 2396.85,6225.37 2396.85,6189.93 2432.29,6189.93 2432.29,6119.06 2396.85,6119.06 2396.85,6154.5 2325.99,6154.5 2325.99,6119.06 2361.41,6119.06 2361.41,6083.63 2325.99,6083.63 2325.99,6048.2 2396.85,6048.2 2396.85,6083.63 2432.28,6083.63 2432.28,6048.2 2467.71,6048.2 2467.71,6083.64 2503.15,6083.64 2503.15,6048.2 2574.02,6048.2 2574.02,6083.64 2538.58,6083.64 2538.58,6119.06 2574.02,6119.06 2574.02,6154.5 2503.15,6154.5 2503.15,6119.06 2467.72,6119.06 2467.72,6189.93 2503.15,6189.93 2503.15,6225.37 2467.71,6225.37 2467.71,6296.23 2503.15,6296.23 2503.15,6260.8 2538.58,6260.8 2538.58,6296.23 2574.02,6296.23 2574.02,6225.37 2538.58,6225.37 2538.58,6189.93 2609.45,6189.93 2644.88,6189.93 2644.88,6225.36 2609.45,6225.36 2609.45,6296.22 2644.88,6296.22 2644.88,6260.79 2680.31,6260.79 2680.31,6296.22 2715.74,6296.22 2715.74,6225.36 2680.31,6225.36 2680.31,6189.93 2715.74,6189.93 2715.74,6119.06 2680.31,6119.06 2680.31,6154.49 2609.45,6154.49 2609.45,6119.06 2644.88,6119.06 2644.88,6083.63 2609.45,6083.63 2609.45,6048.19 2680.31,6048.19 2680.31,6083.63 2715.74,6083.63 2715.74,6012.76 2680.31,6012.76 2680.31,5977.33 2715.74,5977.33 2715.74,5906.46 2680.31,5906.46 2680.31,5941.89 2644.88,5941.89 2644.88,5906.46 2609.44,5906.46 2609.44,5977.33 2644.88,5977.33 2644.88,6012.77 2574.01,6012.77 2574.01,5977.33 2538.57,5977.33 2538.57,6012.77 2467.71,6012.77 2467.71,5977.33 2503.14,5977.33 2503.14,5941.9 2467.71,5941.9 2467.71,5906.46 2538.57,5906.46 2538.57,5941.9 2574,5941.9 2574,5906.47 2574,5835.6 2538.56,5835.6 2538.56,5871.03 2467.7,5871.03 2467.7,5835.6 2503.13,5835.6 2503.13,5800.17 2467.7,5800.17 2467.7,5764.73 2538.56,5764.73 2538.56,5800.17 2574,5800.17 2574,5764.73 2644.87,5764.73 2644.87,5800.17 2609.43,5800.17 2609.43,5871.03 2644.87,5871.03 2644.87,5835.6 2680.3,5835.6 2680.3,5871.03 2715.73,5871.03 2715.73,5800.17 2680.3,5800.17 2680.3,5764.73 2715.73,5764.73 2715.73,5729.3 2715.73,5693.86 2680.29,5693.86 2680.29,5729.3 2609.43,5729.3 2609.43,5693.86 2644.86,5693.86 2644.86,5658.44 2609.43,5658.44 2609.43,5623 2680.29,5623 2680.29,5658.44 2715.73,5658.44 2715.73,5587.57 2680.29,5587.57 2680.29,5552.13 2715.73,5552.13 2715.73,5481.27 2680.29,5481.27 2680.29,5516.7 2644.86,5516.7 2644.86,5481.27 2609.43,5481.27 2609.43,5552.13 2644.86,5552.13 2644.86,5587.57 2573.99,5587.57 2538.56,5587.57 2538.56,5552.14 2574,5552.14 2574,5481.28 2538.56,5481.28 2538.56,5516.71 2503.13,5516.71 2503.13,5481.28 2467.69,5481.28 2467.69,5552.14 2503.13,5552.14 2503.13,5587.58 2467.69,5587.58 2467.69,5658.44 2503.13,5658.44 2503.13,5623.01 2574,5623.01 2574,5658.44 2538.57,5658.44 2538.57,5693.88 2574,5693.88 2574,5729.31 2503.13,5729.31 2503.13,5693.88 2467.7,5693.88 2467.7,5729.31 2396.83,5729.31 2396.83,5693.88 2432.27,5693.88 2432.27,5623.02 2396.83,5623.02 2396.83,5658.44 2361.41,5658.44 2361.41,5623.02 2325.97,5623.02 2325.97,5693.88 2361.41,5693.88 2361.41,5729.31 2290.54,5729.31 2290.54,5693.88 2255.1,5693.88 2255.1,5729.31 2184.23,5729.31 2184.23,5693.88 2219.66,5693.88 2219.66,5658.45 2184.23,5658.45 2184.23,5623.02 2255.1,5623.02 2255.1,5658.45 2290.53,5658.45 2290.53,5623.02 2290.53,5552.15 2255.09,5552.15 2255.09,5587.59 2184.23,5587.59 2184.23,5552.15 2219.66,5552.15 2219.66,5516.72 2184.23,5516.72 2184.23,5481.28 2255.09,5481.28 2255.09,5516.72 2290.53,5516.72 2290.53,5481.29 2361.39,5481.29 2361.39,5516.72 2325.96,5516.72 2325.96,5587.59 2361.39,5587.59 2361.39,5552.15 2396.82,5552.15 2396.82,5587.59 2432.26,5587.59 2432.26,5516.72 2396.82,5516.72 2396.82,5481.28 2432.26,5481.28 2432.26,5445.85 2396.83,5445.85 2396.83,5410.42 2432.26,5410.42 2432.26,5339.55 2396.83,5339.55 2396.83,5374.98 2361.39,5374.98 2361.39,5339.55 2325.96,5339.55 2325.96,5410.42 2361.39,5410.42 2361.39,5445.86 2290.53,5445.86 2290.53,5410.42 2255.09,5410.42 2255.09,5445.86 2184.23,5445.86 2184.23,5410.42 2219.66,5410.42 2219.66,5374.99 2184.23,5374.99 2184.23,5339.55 2255.09,5339.55 2255.09,5374.99 2290.53,5374.99 2290.53,5339.56 2290.53,5268.69 2255.08,5268.69 2255.08,5304.12 2184.22,5304.12 2184.22,5268.69 2219.65,5268.69 2219.65,5233.26 2184.22,5233.26 2184.22,5197.82 2255.08,5197.82 2255.08,5233.26 2290.52,5233.26 2290.52,5197.82 2361.39,5197.82 2361.39,5233.26 2325.95,5233.26 2325.95,5304.12 2361.39,5304.12 2361.39,5268.69 2396.82,5268.69 2396.82,5304.12 2432.25,5304.12 2432.25,5233.26 2396.82,5233.26 2396.82,5197.82 2432.25,5197.82 2467.68,5197.82 2467.68,5233.26 2503.12,5233.26 2503.12,5197.82 2573.99,5197.82 2573.99,5233.26 2538.55,5233.26 2538.55,5268.69 2573.99,5268.69 2573.99,5304.12 2503.12,5304.12 2503.12,5268.69 2467.69,5268.69 2467.69,5339.55 2503.12,5339.55 2503.12,5374.99 2467.69,5374.99 2467.69,5445.85 2503.12,5445.85 2503.12,5410.42 2538.55,5410.42 2538.55,5445.85 2573.99,5445.85 2573.99,5374.99 2538.55,5374.99 2538.55,5339.55 2609.42,5339.55 2644.85,5339.55 2644.85,5374.98 2609.42,5374.98 2609.42,5445.85 2644.85,5445.85 2644.85,5410.42 2680.29,5410.42 2680.29,5445.85 2715.72,5445.85 2715.72,5374.98 2680.29,5374.98 2680.29,5339.54 2715.72,5339.54 2715.72,5268.68 2680.28,5268.68 2680.28,5304.11 2609.42,5304.11 2609.42,5268.68 2644.85,5268.68 2644.85,5233.24 2609.42,5233.24 2609.42,5197.81 2680.28,5197.81 2680.28,5233.24 2715.72,5233.24 2715.71,5197.81 2751.14,5197.81 2751.14,5233.24 2786.58,5233.24 2786.58,5197.81 2857.45,5197.81 2857.45,5233.24 2822.01,5233.24 2822.01,5268.68 2857.45,5268.68 2857.45,5304.11 2786.58,5304.11 2786.58,5268.68 2751.15,5268.68 2751.15,5339.54 2786.58,5339.54 2786.58,5374.98 2751.15,5374.98 2751.15,5445.84 2786.58,5445.84 2786.58,5410.41 2822.01,5410.41 2822.01,5445.84 2857.45,5445.84 2857.45,5374.98 2822.01,5374.98 2822.01,5339.54 2892.88,5339.54 2928.31,5339.54 2928.31,5374.98 2892.88,5374.98 2892.88,5445.84 2928.31,5445.84 2928.31,5410.41 2963.74,5410.41 2963.74,5445.84 2999.18,5445.84 2999.18,5374.98 2963.74,5374.98 2963.74,5339.54 2999.18,5339.54 2999.18,5268.67 2963.74,5268.67 2963.74,5304.1 2892.88,5304.1 2892.88,5268.67 2928.31,5268.67 2928.31,5233.24 2892.88,5233.24 2892.88,5197.8 2963.74,5197.8 2963.74,5233.24 2999.17,5233.24 2999.17,5197.81 3070.04,5197.8 3070.04,5233.24 3034.6,5233.24 3034.6,5304.1 3070.04,5304.1 3070.04,5268.67 3105.47,5268.67 3105.47,5304.1 3140.9,5304.1 3140.9,5233.24 3105.47,5233.24 3105.47,5197.8 3176.33,5197.8 3176.34,5233.23 3211.78,5233.23 3211.78,5197.8 3282.64,5197.8 3282.64,5233.23 3247.21,5233.23 3247.21,5268.66 3282.64,5268.66 3282.64,5304.1 3211.78,5304.1 3211.78,5268.66 3176.34,5268.66 3176.34,5304.1 3176.34,5374.96 3211.78,5374.96 3211.78,5339.53 3282.64,5339.53 3282.64,5374.96 3247.21,5374.96 3247.21,5410.4 3282.64,5410.4 3282.64,5445.83 3211.78,5445.83 3211.78,5410.4 3176.35,5410.4 3176.35,5445.83 3105.48,5445.83 3105.48,5410.39 3140.91,5410.39 3140.91,5339.53 3105.48,5339.53 3105.48,5374.96 3070.05,5374.96 3070.05,5339.53 3034.61,5339.53 3034.61,5410.39 3070.05,5410.39 3070.05,5445.83 3034.61,5445.83 3034.61,5481.27 3070.05,5481.26 3070.05,5516.7 3034.61,5516.7 3034.61,5587.56 3070.05,5587.56 3070.05,5552.13 3105.48,5552.13 3105.48,5587.56 3140.91,5587.56 3140.91,5516.7 3105.48,5516.7 3105.48,5481.26 3176.34,5481.26 3176.34,5516.69 3211.78,5516.69 3211.78,5481.26 3282.64,5481.26 3282.64,5516.69 3247.22,5516.69 3247.22,5552.12 3282.64,5552.12 3282.64,5587.56 3211.78,5587.56 3211.78,5552.12 3176.35,5552.12 3176.35,5587.56 3176.35,5658.42 3211.79,5658.42 3211.79,5622.99 3282.65,5622.99 3282.65,5658.42 3247.22,5658.42 3247.22,5693.85 3282.65,5693.85 3282.65,5729.29 3211.79,5729.29 3211.79,5693.85 3176.35,5693.85 3176.35,5729.28 3105.49,5729.28 3105.49,5693.85 3140.92,5693.85 3140.92,5622.99 3105.49,5622.99 3105.49,5658.42 3070.05,5658.42 3070.05,5622.99 3034.62,5622.99 3034.62,5693.85 3070.05,5693.85 3070.05,5729.29 3034.62,5729.29 2999.19,5729.29 2999.19,5693.86 2963.75,5693.86 2963.75,5729.29 2892.88,5729.29 2892.88,5693.86 2928.32,5693.86 2928.32,5658.43 2892.88,5658.43 2892.88,5622.99 2963.75,5622.99 2963.75,5658.43 2999.18,5658.43 2999.18,5587.56 2963.75,5587.56 2963.75,5552.12 2999.18,5552.12 2999.18,5481.26 2963.75,5481.26 2963.75,5516.69 2928.32,5516.69 2928.32,5481.26 2892.88,5481.26 2892.88,5552.12 2928.32,5552.12 2928.32,5587.57 2857.45,5587.57 2822.02,5587.57 2822.02,5552.13 2857.45,5552.13 2857.45,5481.27 2822.02,5481.27 2822.02,5516.7 2786.59,5516.7 2786.59,5481.27 2751.15,5481.27 2751.15,5552.13 2786.59,5552.13 2786.59,5587.57 2751.15,5587.57 2751.15,5658.44 2786.59,5658.44 2786.59,5623 2857.45,5623 2857.45,5658.44 2822.03,5658.44 2822.03,5693.87 2857.45,5693.87 2857.45,5729.3 2786.59,5729.3 2786.59,5693.87 2751.16,5693.87 2751.16,5764.73 2786.59,5764.73 2786.59,5800.16 2751.16,5800.16 2751.16,5871.03 2786.59,5871.03 2786.59,5835.6 2822.03,5835.6 2822.03,5871.03 2857.46,5871.03 2857.46,5800.16 2822.03,5800.16 2822.03,5764.73 2892.89,5764.73 2892.89,5800.16 2928.33,5800.16 2928.33,5764.73 2999.19,5764.73 2999.19,5800.16 2963.76,5800.16 2963.76,5835.59 2999.19,5835.59 2999.19,5871.03 2928.33,5871.03 2928.33,5835.59 2892.9,5835.59 2892.9,5871.02 2892.9,5941.89 2928.34,5941.89 2928.34,5906.46 2999.2,5906.46 2999.2,5941.89 2963.77,5941.89 2963.77,5977.33 2999.2,5977.33 2999.2,6012.76 2928.34,6012.76 2928.34,5977.33 2892.9,5977.33 2892.9,6012.75 2822.03,6012.75 2822.03,5977.32 2857.47,5977.32 2857.47,5906.46 2822.03,5906.46 2822.03,5941.89 2786.6,5941.89 2786.6,5906.46 2751.17,5906.46 2751.17,5977.32 2786.6,5977.32 2786.6,6012.76 2751.17,6012.76 2751.17,6048.19 2751.17,6083.63 2786.61,6083.63 2786.61,6048.2 2857.47,6048.2 2857.47,6083.63 2822.04,6083.63 2822.04,6119.06 2857.47,6119.06 2857.47,6154.49 2786.61,6154.49 2786.61,6119.06 2751.17,6119.06 2751.17,6189.93 2786.61,6189.93 2786.61,6225.36 2751.17,6225.36 2751.17,6296.23 2786.61,6296.23 2786.61,6260.79 2822.04,6260.79 2822.04,6296.23 2857.47,6296.23 2857.47,6225.36 2822.04,6225.36 2822.04,6189.92 2892.9,6189.92 2928.34,6189.92 2928.34,6225.36 2892.9,6225.36 2892.9,6296.22 2928.34,6296.22 2928.34,6260.79 2963.77,6260.79 2963.77,6296.22 2999.2,6296.22 2999.2,6225.36 2963.77,6225.36 2963.77,6189.91 2999.2,6189.91 2999.2,6119.05 2963.76,6119.05 2963.76,6154.48 2892.9,6154.48 2892.9,6119.05 2928.33,6119.05 2928.33,6083.62 2892.9,6083.62 2892.9,6048.19 2963.76,6048.19 2963.76,6083.62 2999.2,6083.62 2999.2,6048.19 3034.63,6048.19 3034.63,6083.62 3070.07,6083.62 3070.07,6048.19 3140.93,6048.19 3140.93,6083.62 3105.5,6083.62 3105.5,6119.05 3140.93,6119.05 3140.93,6154.49 3070.07,6154.49 3070.07,6119.05 3034.63,6119.05 3034.63,6189.92 3070.06,6189.92 3070.06,6225.35 3034.63,6225.35 3034.63,6296.22 3070.06,6296.22 3070.06,6260.79 3105.5,6260.79 3105.5,6296.22 3140.93,6296.22 3140.93,6225.35 3105.5,6225.35 3105.5,6189.91 3176.36,6189.91 3211.8,6189.91 3211.8,6225.35 3176.36,6225.35 3176.36,6296.21 3211.8,6296.21 3211.8,6260.78 3247.23,6260.78 3247.23,6296.21 3282.66,6296.21 3282.66,6225.35 3247.23,6225.35 3247.23,6189.91 3282.66,6189.91 3282.66,6119.04 3247.22,6119.04 3247.22,6154.48 3176.36,6154.48 3176.36,6119.04 3211.79,6119.04 3211.79,6083.61 3176.36,6083.61 3176.36,6048.18 3247.22,6048.18 3247.22,6083.61 3282.66,6083.61 3282.66,6012.75 3247.22,6012.75 3247.22,5977.31 3282.66,5977.31 3282.66,5906.45 3247.22,5906.45 3247.22,5941.88 3211.79,5941.88 3211.79,5906.45 3176.36,5906.45 3176.36,5977.31 3211.79,5977.31 3211.79,6012.75 3140.93,6012.75